# Altium PCB UAV1.0plus.PcbDoc
Units mm, origin at the board's own origin, x right, y up, seen from the top; angles counter-clockwise.
Board outline 152.4 x 101.6 mm, 2 copper layers (Top Layer, Bottom Layer); 12 components, 2 nets, 24 pads, 6 vias.
Unrouted connection lines stored in the file: 10.
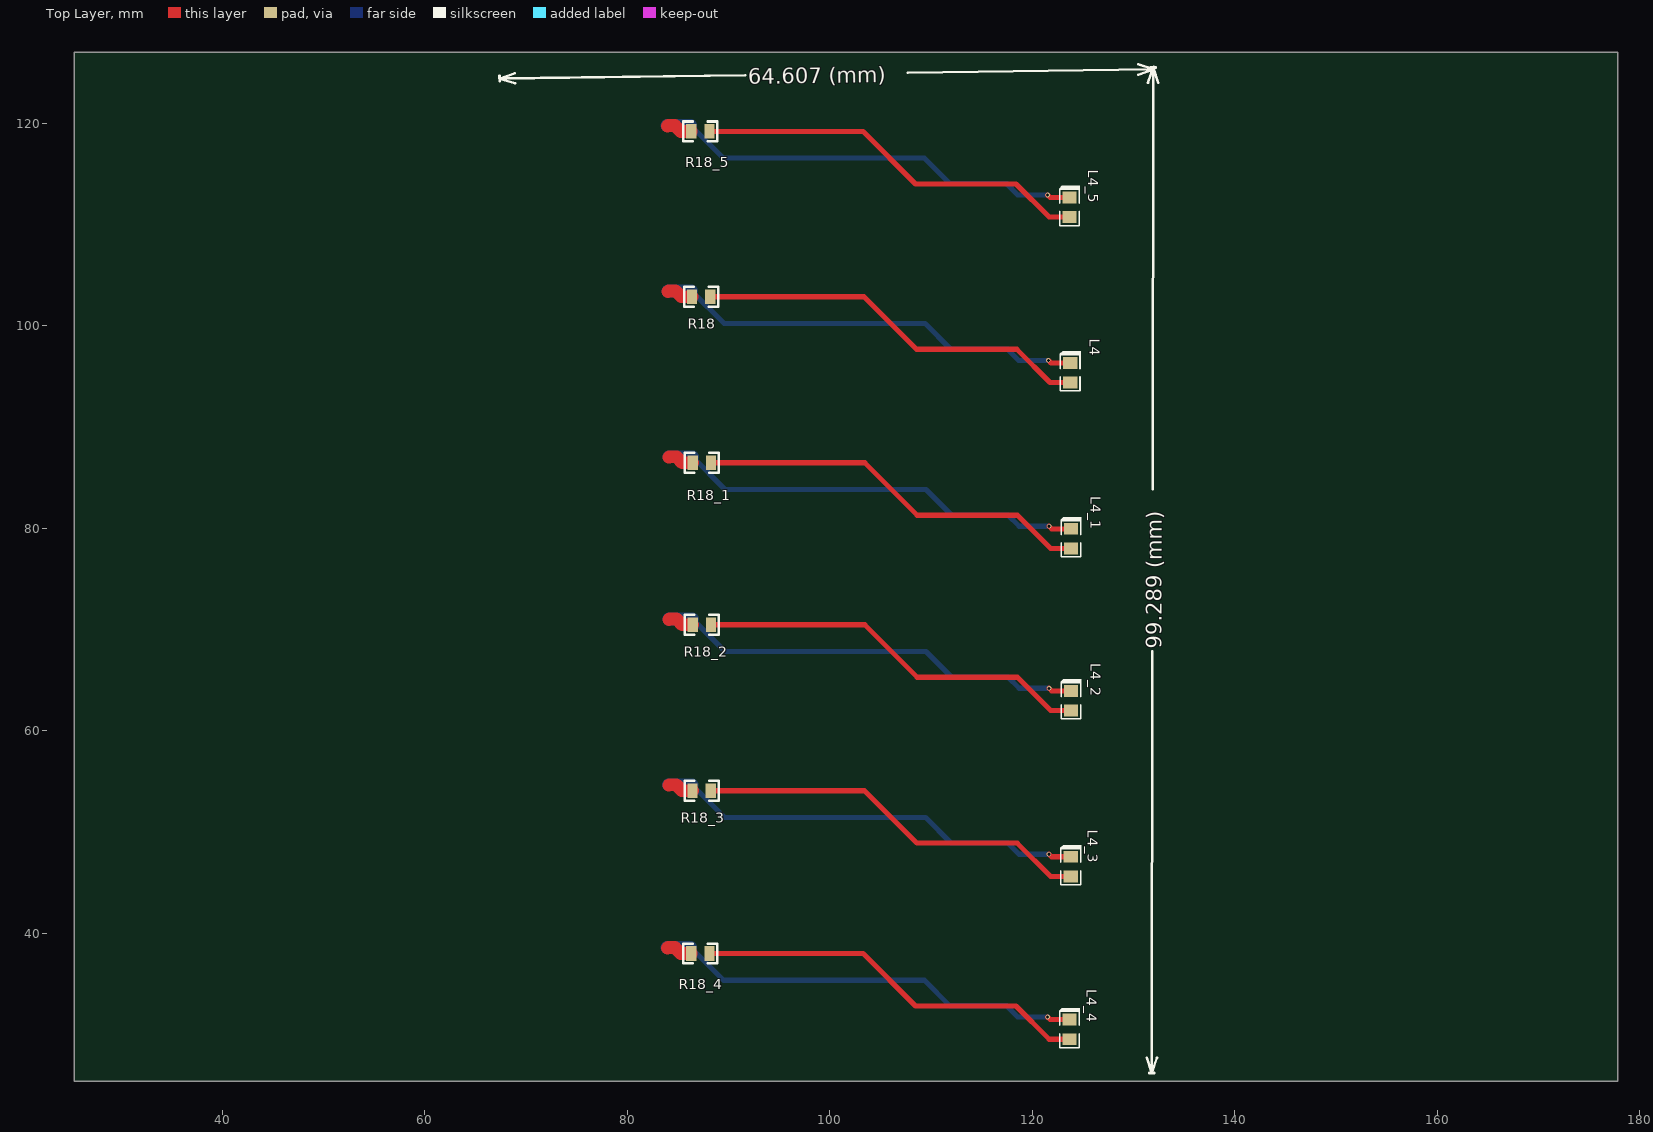
[diagram p0: Top Layer view]
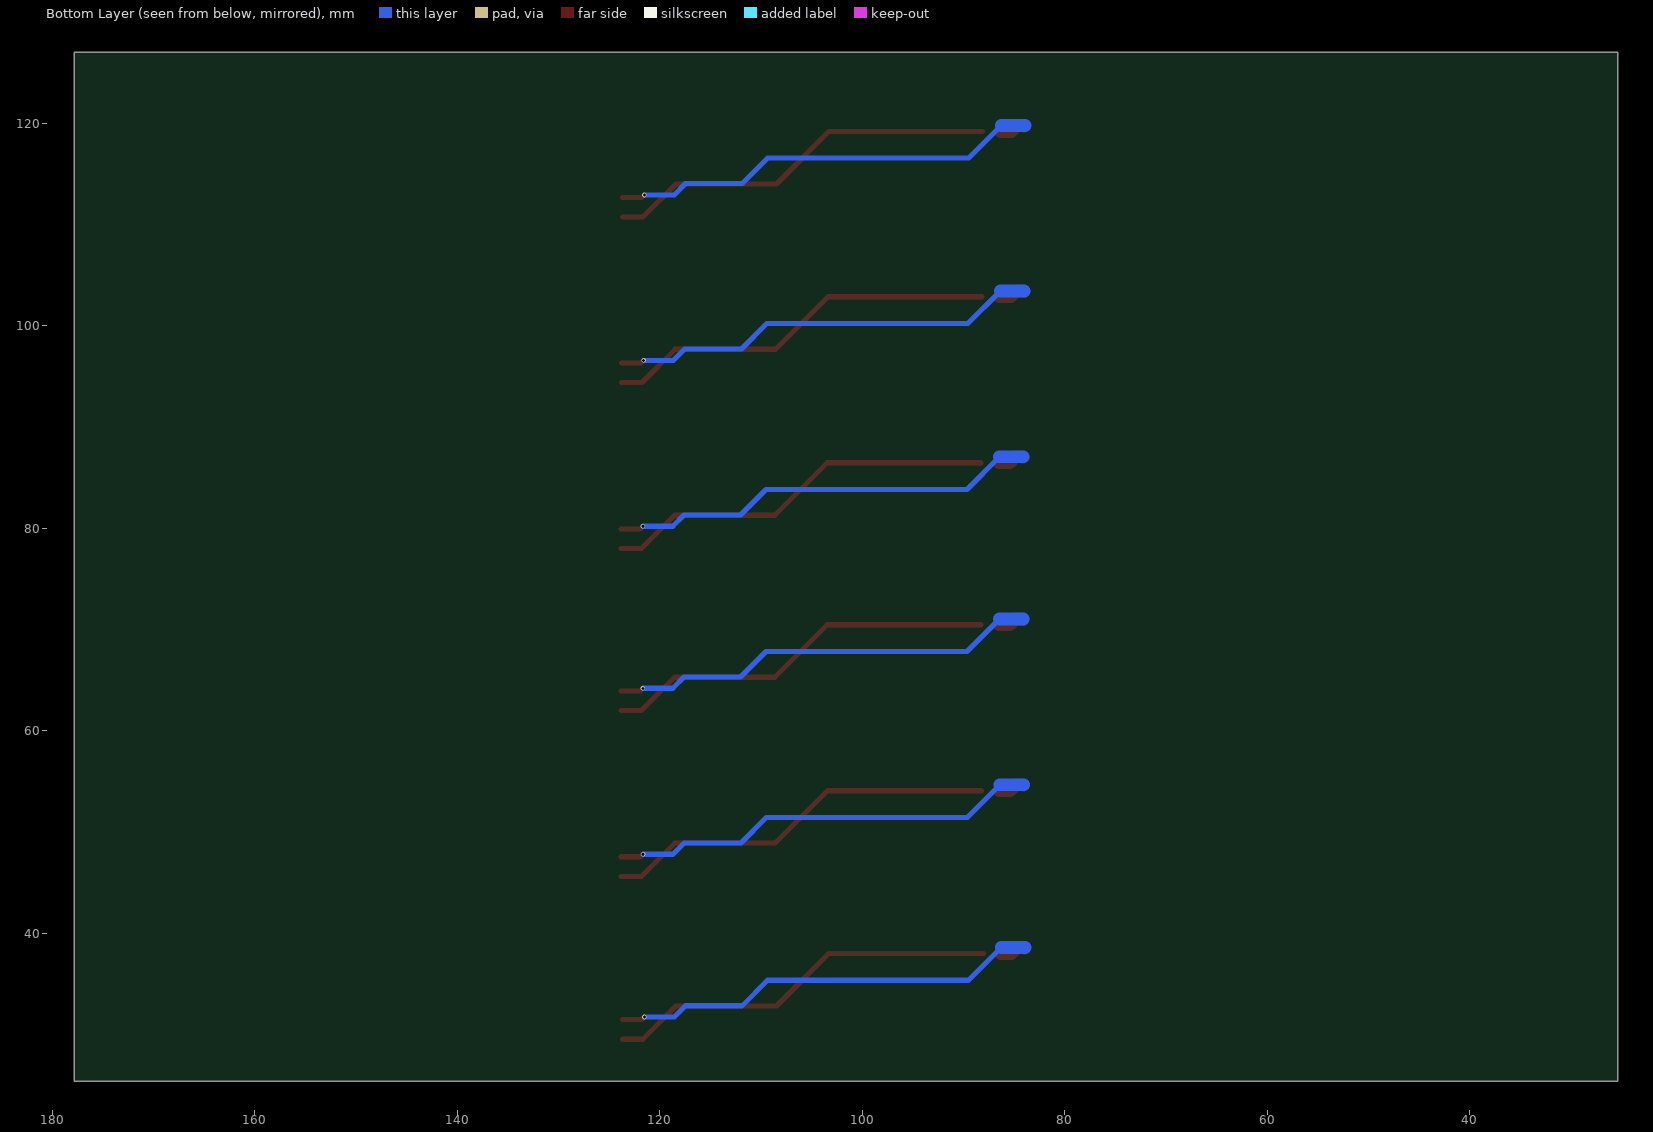
[diagram p1: Bottom Layer view, seen from below]

## Layer stack, top to bottom
Top Solder: solder mask 0.0102, Solder Resist, Dk 3.5
Top Layer: signal copper 0.0356
Dielectric 1: dielectric 0.32, FR-4, Dk 4.8
Bottom Layer: signal copper 0.0356
Bottom Solder: solder mask 0.0102, Solder Resist, Dk 3.5

## Board outline
25.4,25.4 177.8,25.4 177.8,127 25.4,127

## Design rules (kind name [scope] priority, off if disabled: settings)
Clearance [All] p1: gap=0.254
PolygonConnect [All] p1: connectstyle=Relief reliefconductorwidth=0.254 reliefentries=4 polygonreliefangle="90 Angle" airgapwidth=0.254
RoutingVias [All] p1: holewidth=0.711 width=1.27 viastyle="Through Hole" minholewidth=0.711 minwidth=1.27 maxholewidth=0.711 maxwidth=1.27
SolderMaskExpansion [All] p1: expansion=0.102
Width [All] p1: maxlimit=0.254 minlimit=0.254 preferedwidth=0.254
29 further rules are at their usual default settings.

## Components (designator, comment, footprint, x,y, rotation, side; value= is the part's Value field where it differs from the comment)
L4 "LED" D0805 123.742,94.424 r90 top
L4_1 "LED" D0805 123.818,78.041 r90 top (schematic designator L4)
L4_2 "LED" D0805 123.818,62.039 r90 top (schematic designator L4)
L4_3 "LED" D0805 123.793,45.656 r90 top (schematic designator L4)
L4_4 "LED" D0805 123.666,29.578 r90 top (schematic designator L4)
L4_5 "LED" D0805 123.666,110.756 r90 top (schematic designator L4)
R18 "Res1" 0805R 87.293,102.857 r180 top
R18_1 "Res1" 0805R 87.369,86.474 r180 top (schematic designator R18)
R18_2 "Res1" 0805R 87.369,70.472 r180 top (schematic designator R18)
R18_3 "Res1" 0805R 87.344,54.089 r180 top (schematic designator R18)
R18_4 "Res1" 0805R 87.217,38.011 r180 top (schematic designator R18)
R18_5 "Res1" 0805R 87.217,119.189 r180 top (schematic designator R18)

## Footprints (in the part's own frame and the unit in brackets; to place one, negate y for a bottom-side part, rotate by r counter-clockwise, add the part's x,y. Pads: shape width x height; smd on the part's side, far side on the other; paste and mask are expansions set on the pad)
0805R [mm]
  rect 1x1.45 smd: 1(-0.9,0) 2(0.9,0)
  Top Layer pour cut-out: -0.432,0.749 -0.432,-0.737 0.406,-0.737 0.406,0.749
  silkscreen extent -1.68,-0.98 1.68,0.98, body extent -1,-0.62 1,0.63, height 0.5
D0805 [mil]
  rect 46x56 smd: 1(-1,0) 2(75,0)
  silkscreen extent -34,-40 120,40

## Part data
R18 R18_1 R18_2 R18_3 R18_4 R18_5: "Resistor"

## Via types
v1: diameter 0.457, hole 0.305, Top Layer to Bottom Layer, 6 vias

## Nets (pads, with @x,y where several pads share a name; then routed paths per layer and width w, separated by ;. In a path a pad name is that pad's centre, name@x,y a point inside that pad or via, vN(x,y) a via of type N, cw(c..) or ccw(c..) an arc to the next point about the centre after c; other vN are vias at no path point)
GND: R18.1 R18_1.1 R18_2.1 R18_3.1 R18_4.1 R18_5.1 | length 15.2
  Top Layer w0.508: R18_4.1@88.04,38.011 103.219,38.011
VCC: R18.2 R18_1.2 R18_2.2 R18_3.2 R18_4.2 R18_5.2
pads on no net: L4.1 L4.2 L4_1.1 L4_1.2 L4_2.1 L4_2.2 L4_3.1 L4_3.2 L4_4.1 L4_4.2 L4_5.1 L4_5.2
copper on no net: | length 490.9
  Top Layer w0.508: 88.117,119.189 103.295,119.189 108.476,114.007 118.382,114.007 121.659,110.731 123.666,110.731 ; 88.193,102.857 103.371,102.857 108.553,97.675 118.459,97.675 121.735,94.399 123.742,94.399 ; 88.244,54.089 103.422,54.089 108.603,48.907 118.509,48.907 121.786,45.631 123.793,45.631 ; 88.269,70.472 103.447,70.472 108.629,65.29 118.535,65.29 121.811,62.014 123.818,62.014 ; 88.269,86.474 103.447,86.474 108.629,81.292 118.535,81.292 121.811,78.016 123.818,78.016 ; 103.295,38.011 108.476,32.829 118.382,32.829 121.659,29.552 123.666,29.552 ; v1(121.507,31.737) 121.761,31.483 123.666,31.483 ; v1(121.507,112.915) 121.761,112.661 123.666,112.661 ; v1(121.583,96.583) 121.837,96.329 123.742,96.329 ; v1(121.634,47.815) 121.888,47.561 123.793,47.561 ; v1(121.659,64.198) 121.913,63.944 123.818,63.944 ; v1(121.659,80.2) 121.913,79.946 123.818,79.946
  Top Layer w1.27: 83.965,38.544 84.016,38.595 84.702,38.595 85.286,38.011 86.317,38.011 ; 83.965,119.722 84.016,119.773 84.702,119.773 85.286,119.189 86.317,119.189 ; 84.042,103.39 84.092,103.441 84.778,103.441 85.362,102.857 86.393,102.857 ; 84.092,54.622 84.143,54.673 84.829,54.673 85.413,54.089 86.444,54.089 ; 84.118,71.005 84.169,71.056 84.854,71.056 85.439,70.472 86.469,70.472 ; 84.118,87.007 84.169,87.058 84.854,87.058 85.439,86.474 86.469,86.474
  Bottom Layer w0.508: 86.277,38.595 89.503,35.369 109.34,35.369 111.855,32.854 117.443,32.854 118.56,31.737 v1(121.507,31.737) ; 86.277,119.773 89.503,116.547 109.34,116.547 111.855,114.033 117.443,114.033 118.56,112.915 v1(121.507,112.915) ; 86.353,103.441 89.579,100.215 109.416,100.215 111.931,97.701 117.519,97.701 118.636,96.583 v1(121.583,96.583) ; 86.404,54.673 89.63,51.447 109.467,51.447 111.982,48.933 117.57,48.933 118.687,47.815 v1(121.634,47.815) ; 86.429,71.056 89.655,67.83 109.492,67.83 112.007,65.316 117.595,65.316 118.713,64.198 v1(121.659,64.198) ; 86.429,87.058 89.655,83.832 109.492,83.832 112.007,81.318 117.595,81.318 118.713,80.2 v1(121.659,80.2)
  Bottom Layer w1.27: 83.94,38.595 86.277,38.595 ; 83.94,119.773 86.277,119.773 ; 84.016,103.441 86.353,103.441 ; 84.067,54.673 86.404,54.673 ; 84.092,71.056 86.429,71.056 ; 84.092,87.058 86.429,87.058

## Silkscreen, mask and mechanical layers (free items; w line width, h text height)
Top Overlay:
  lines w0.254: 67.383,124.663 67.39,124.155 ; 68.903,124.939 67.386,124.409 ; 68.917,123.923 67.386,124.409 ; 91.663,124.753 67.386,124.409 ; 107.71,124.98 131.987,125.324 ; 130.456,125.81 131.987,125.324 ; 130.47,124.794 131.987,125.324 ; 131.295,27.737 131.801,26.213 ; 131.418,123.978 131.928,125.501 ; 131.547,26.213 132.055,26.212 ; 131.674,125.502 132.182,125.501 ; 131.854,67.833 131.801,26.213 ; 131.874,83.881 131.928,125.501 ; 131.983,125.578 131.99,125.07 ; 132.311,27.736 131.801,26.213 ; 132.434,123.977 131.928,125.501
  text "64.607 (mm)" at 91.93,123.842 h1.52 r0.81
  text "99.289 (mm)" at 132.768,68.086 h1.52 r89.93
Top Solder:
  lines w1.27: 84.016,38.595 84.423,38.595 85.515,37.503 ; 84.016,119.773 84.423,119.773 85.515,118.681 ; 84.092,103.441 84.499,103.441 85.591,102.349 ; 84.143,54.673 84.55,54.673 85.642,53.581 ; 84.169,71.056 84.575,71.056 85.667,69.964 ; 84.169,87.058 84.575,87.058 85.667,85.966
Bottom Solder:
  lines w1.27: 83.94,38.646 84.296,38.646 85.362,37.579 ; 83.94,119.824 84.296,119.824 85.362,118.757 ; 84.016,103.492 84.372,103.492 85.439,102.425 ; 84.067,54.724 84.423,54.724 85.489,53.657 ; 84.092,71.107 84.448,71.107 85.515,70.04 ; 84.092,87.109 84.448,87.109 85.515,86.042
Mechanical 1:
  lines w0.254: 72.273,37.488 78.692,33.782 78.796,33.81 81.159,37.902 81.263,37.929 84.1,36.291 84.11,36.256 84.668,37.224 84.622,37.398 81.938,38.947 cw(c93.248,-13.809) 120.64,32.676 ccw(c118.867,40.958) 127.169,42.638 ; 72.273,118.667 78.692,114.961 78.796,114.989 81.159,119.08 81.263,119.108 84.1,117.47 84.11,117.435 84.668,118.403 84.622,118.576 81.938,120.126 cw(c93.248,67.369) 120.64,113.854 ccw(c118.867,122.137) 127.169,123.816 ; 72.314,37.465 68.731,33.882 68.731,33.867 75.493,29.964 cw(c81.26,-5.916) 94.228,28.032 ; 72.314,118.643 68.731,115.061 68.731,115.046 75.493,111.142 cw(c81.26,75.262) 94.228,109.21 ; 72.35,102.334 78.768,98.628 78.873,98.656 81.235,102.748 81.339,102.776 84.176,101.137 84.186,101.103 84.745,102.071 84.698,102.244 82.014,103.793 cw(c93.324,51.037) 120.716,97.522 ccw(c118.943,105.804) 127.245,107.484 ; 72.39,102.311 68.807,98.729 68.807,98.714 75.569,94.81 cw(c81.336,58.93) 94.304,92.878 ; 72.4,53.566 78.819,49.86 78.923,49.888 81.286,53.98 81.39,54.008 84.227,52.369 84.237,52.335 84.795,53.303 84.749,53.476 82.065,55.025 cw(c93.375,2.269) 120.767,48.754 ccw(c118.994,57.036) 127.296,58.716 ; 72.426,69.949 78.845,66.243 78.949,66.271 81.311,70.363 81.415,70.391 84.253,68.752 84.262,68.718 84.821,69.686 84.774,69.859 82.091,71.408 cw(c93.4,18.652) 120.792,65.137 ccw(c119.019,73.419) 127.321,75.099 ; 72.426,85.951 78.845,82.245 78.949,82.273 81.311,86.365 81.415,86.393 84.253,84.754 84.262,84.72 84.821,85.688 84.774,85.861 82.091,87.41 cw(c93.4,34.654) 120.792,81.139 ccw(c119.019,89.421) 127.321,91.101 ; 72.441,53.543 68.858,49.961 68.858,49.946 75.62,46.042 cw(c81.387,10.162) 94.355,44.11 ; 72.466,69.926 68.884,66.344 68.884,66.329 75.645,62.425 cw(c81.412,26.545) 94.38,60.493 ; 72.466,85.928 68.884,82.346 68.884,82.331 75.645,78.427 cw(c81.412,42.547) 94.38,76.495 ; 94.221,28.014 cw(c108.282,4.541) 124.438,26.625 127.226,31.454 cw(c154.729,25.893) 130.933,40.762 130.933,40.776 128.085,43.624 127.193,42.731 ; 94.221,109.192 cw(c108.282,85.72) 124.438,107.804 127.226,112.632 cw(c154.729,107.072) 130.933,121.941 130.933,121.955 128.085,124.802 127.193,123.91 ; 94.297,92.86 cw(c108.359,69.388) 124.514,91.471 127.302,96.3 cw(c154.805,90.739) 131.009,105.609 131.009,105.622 128.161,108.47 127.269,107.578 ; 94.348,44.092 cw(c108.409,20.62) 124.565,42.703 127.353,47.532 cw(c154.856,41.971) 131.06,56.841 131.06,56.854 128.212,59.702 127.32,58.81 ; 94.373,60.475 cw(c108.435,37.003) 124.59,59.086 127.378,63.915 cw(c154.881,58.354) 131.085,73.224 131.085,73.237 128.238,76.085 127.345,75.193 ; 94.373,76.477 cw(c108.435,53.005) 124.59,75.088 127.378,79.917 cw(c154.881,74.356) 131.085,89.226 131.085,89.239 128.238,92.087 127.345,91.195 ; 127.269,107.527 128.161,108.419